# Altium PCB PCB.PcbDoc (part 1 of 2)
Units mil, origin at the board's own origin, x right, y up, seen from the top; angles counter-clockwise.
Board outline 2112 x 1014.5 mil, 4 copper layers (Top Layer, Layer 1, Layer 2, Bottom Layer), stack 36.268 mil thick; 50 components, 39 nets, 226 pads, 302 vias.
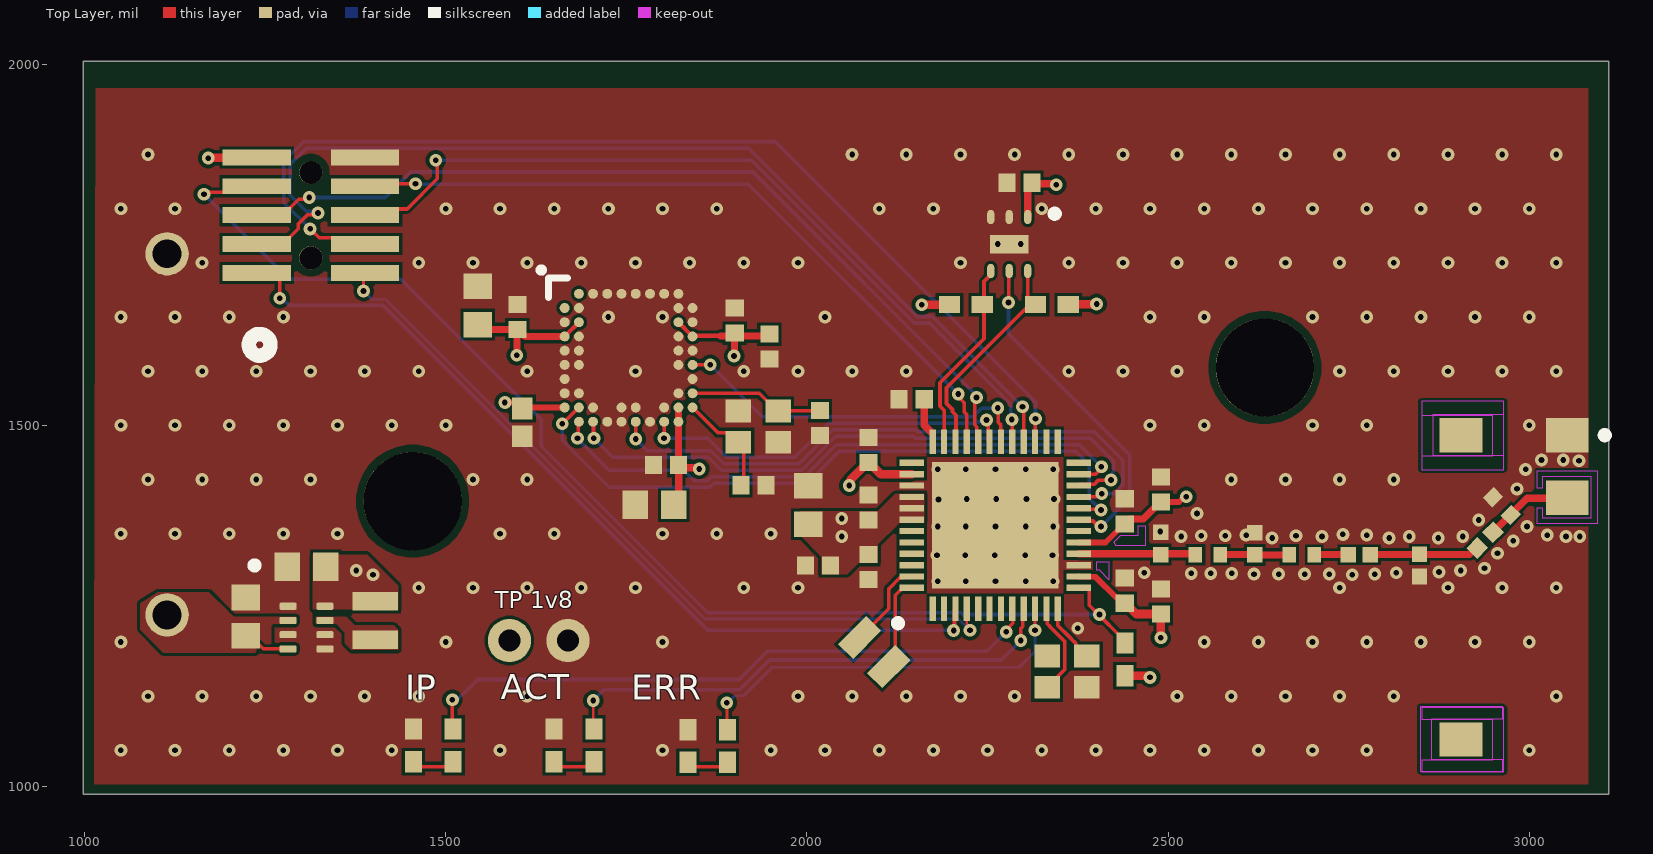
[diagram p0: Top Layer view]
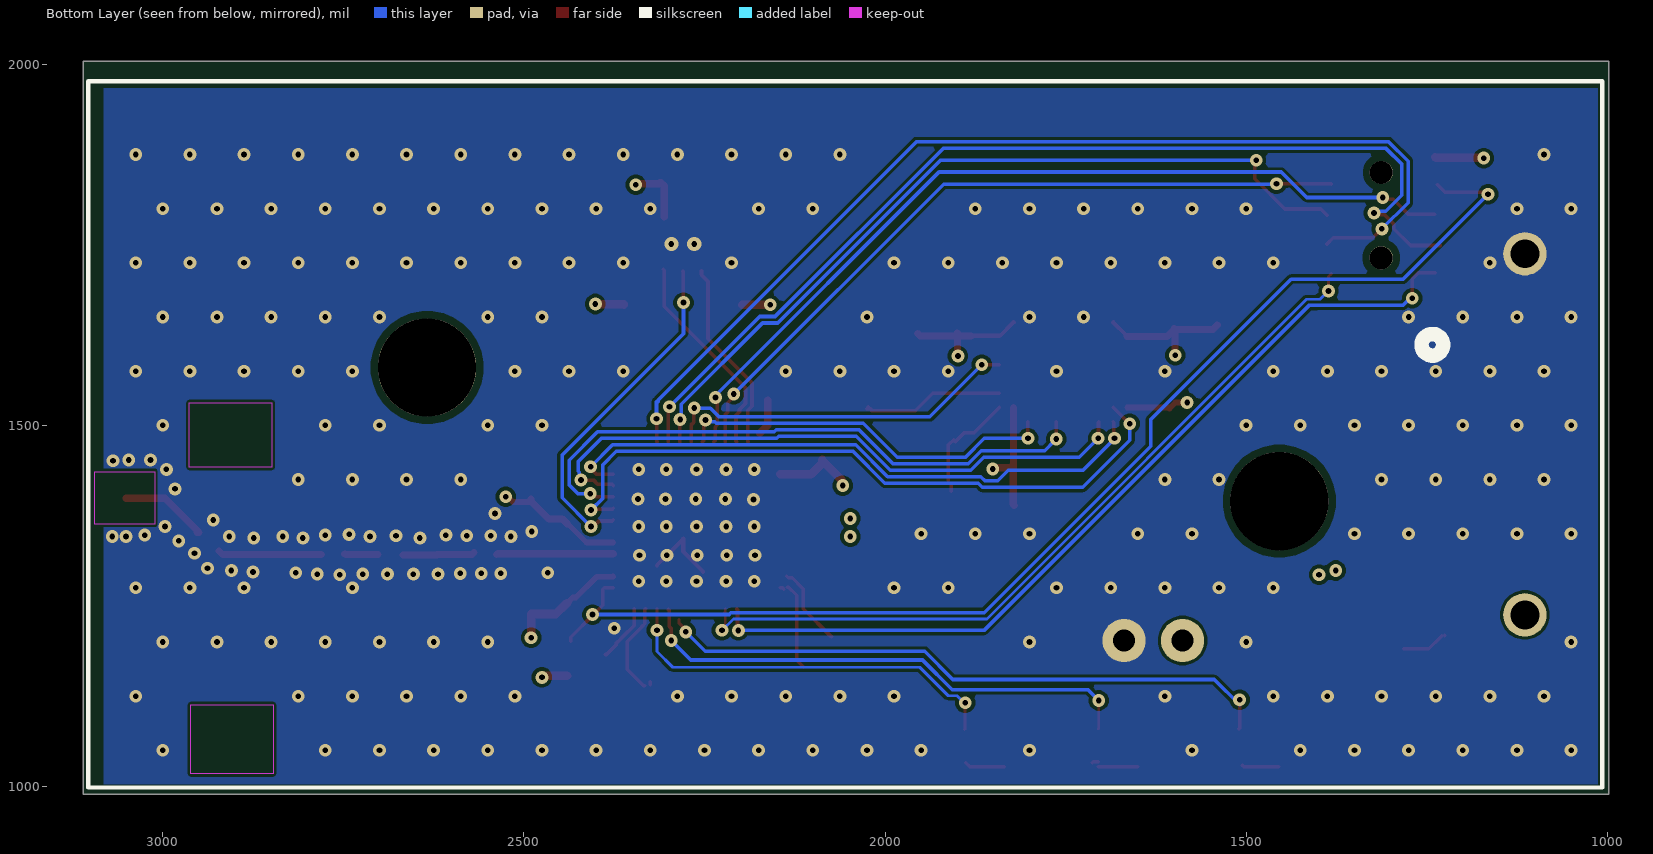
[diagram p1: Bottom Layer view, seen from below]
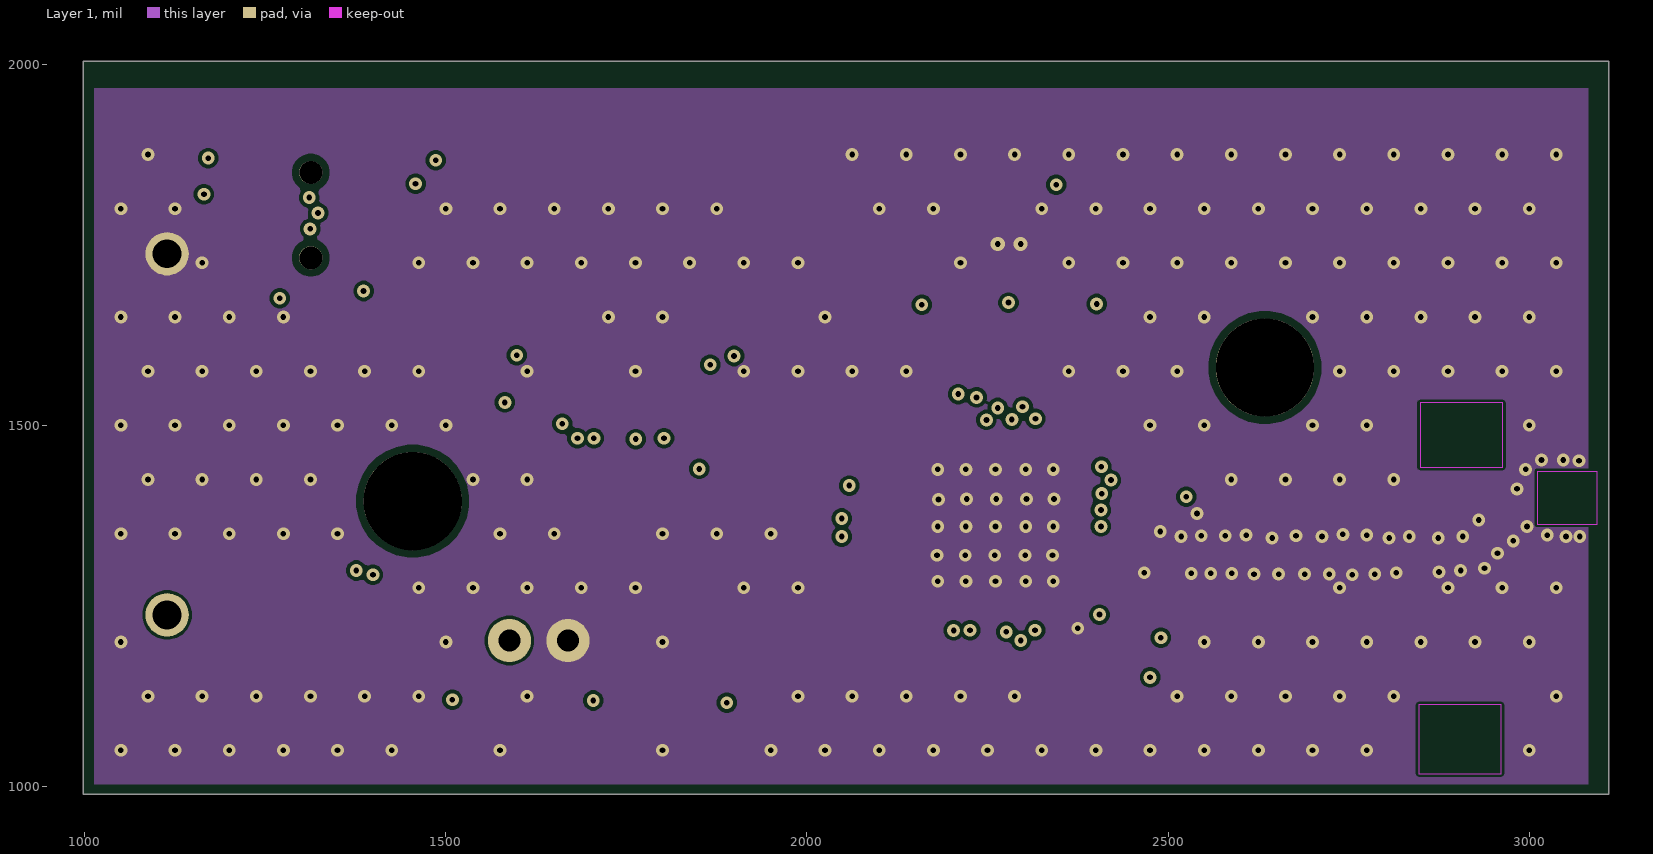
[diagram p2: Layer 1]
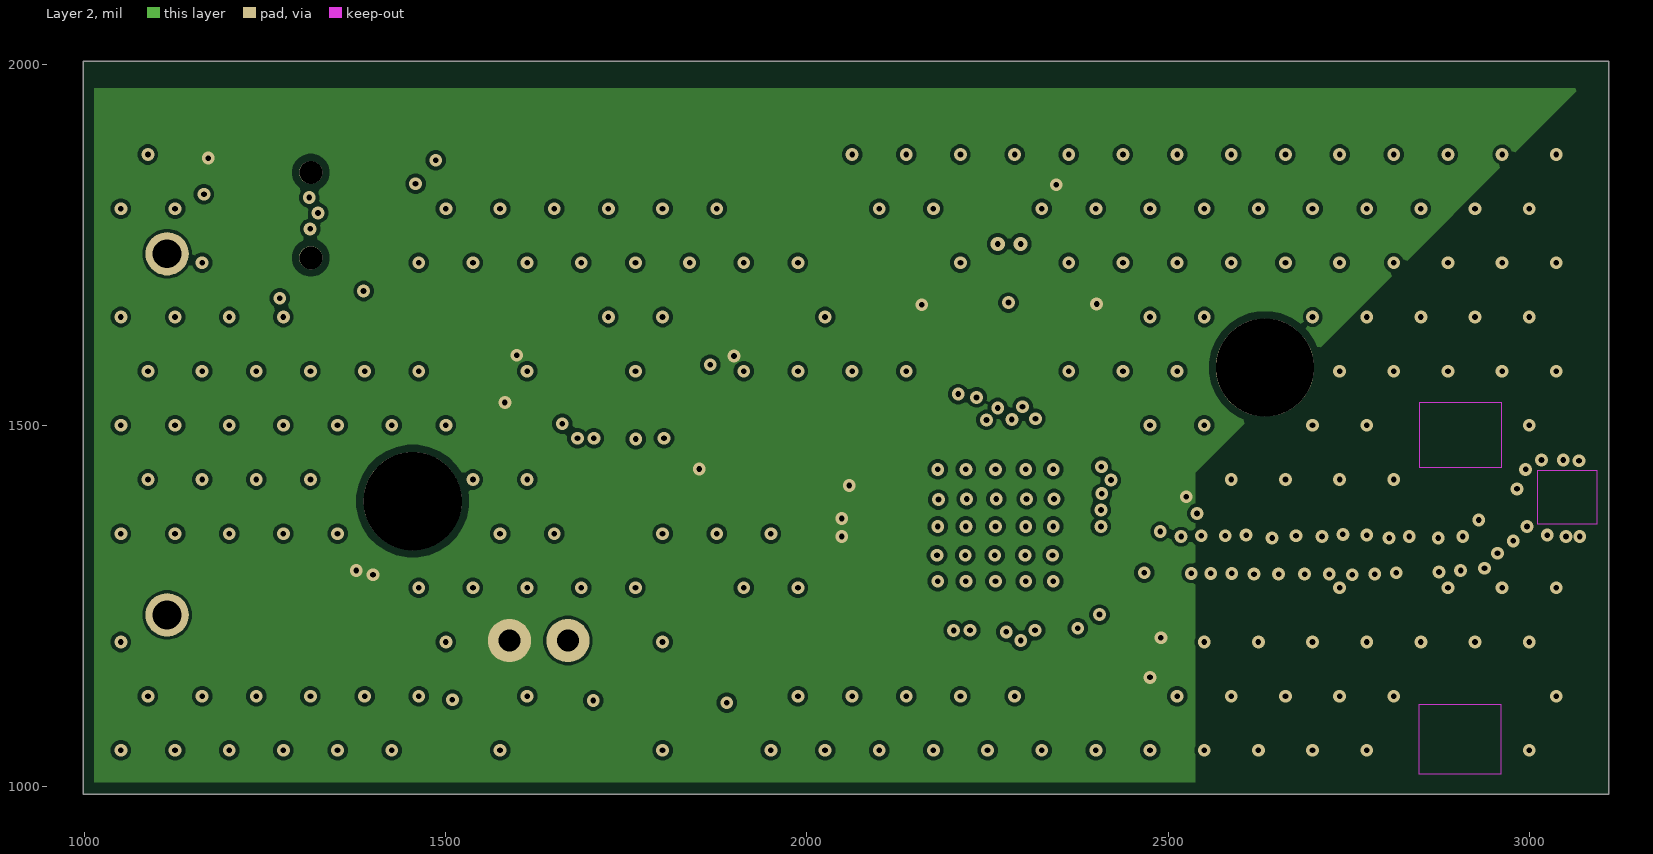
[diagram p3: Layer 2]

## Layer stack, top to bottom
Top Solder: solder mask 0.5, Solder Resist, Dk 3.8
Top Layer: signal copper 1.378
Dielectric 2: prepreg 8.284, PP-006, Dk 4.6
Layer 1: signal copper 0.598
Dielectric 1: dielectric 15.748, FR-4, Dk 4.6
Layer 2: signal copper 0.598
Dielectric 3: prepreg 8.284, PP-006, Dk 4.6
Bottom Layer: signal copper 1.378
Bottom Solder: solder mask 0.5, Solder Resist, Dk 3.8

## Board outline
998,989.5 3110,989.5 3110,2004 998,2004

## Design rules (kind name [scope] priority, off if disabled: settings)
BoardOutlineClearance [All] p1: gap=7.87 ignorepadtopadclearanceinfootprint=FALSE
Clearance [All] p1: gap=4 ignorepadtopadclearanceinfootprint=FALSE except(5: Arc-Via Track-Via SMDPad-Via THPad-Via Via-Via Via-Fill Via-Poly Via-Region Via-Text; 9.84: Arc-Hole Track-Hole SMDPad-Hole THPad-Hole Via-Hole Fill-Hole Poly-Hole Region-Hole Text-Hole)
ComponentClearance [All] p1: gap=4 collisioncheckmode=3 verticalgap=4 showdistances=TRUE
DiffPairsRouting [All] p1: maxlimit=4 minlimit=4 mostfreqgap=4 toplayer_minwidth=4 toplayer_maxwidth=71497.94 toplayer_prefwidth=4 midlayer1_minwidth=4 midlayer1_maxwidth=71497.94 midlayer1_prefwidth=4 midlayer2_minwidth=4 midlayer2_maxwidth=71497.94 midlayer2_prefwidth=4 bottomlayer_minwidth=4 bottomlayer_maxwidth=71497.94 bottomlayer_prefwidth=4 maxuncoupledlength=500
Height [All] p1: minheight=0 maxheight=71497.94 prefheight=500
HoleSize [All] p1: absolutevalues=TRUE maxlimit=248.03 minlimit=7.87 maxpercent=80.000 minpercent=20.000
HoleToHoleClearance [All] p1: gap=9.84 allowstackedmicrovias=FALSE
MinimumAnnularRing [All] p1: minimumring=3
MinimumSolderMaskSliver [All] p1: minsoldermaskwidth=0
PlaneClearance [All] p1: clearance=4
PlaneConnect PlaneConnectPowerPads [InPadClass('PowerPads')] p1: planeconnectstyle=Direct reliefexpansion=20 reliefentries=4 reliefconductorwidth=10 reliefairgap=10
PlaneConnect [All] p2: planeconnectstyle=Direct reliefexpansion=11.81 reliefentries=4 reliefconductorwidth=4 reliefairgap=4
PolygonConnect PolygonConnectPowerPads [All vs (InPadClass('PowerPads'))] p1: connectstyle=Direct reliefconductorwidth=10 reliefentries=4 polygonreliefangle="90 Angle" airgapwidth=10
PolygonConnect [All] p2: connectstyle=Direct reliefconductorwidth=4 reliefentries=4 polygonreliefangle="90 Angle" airgapwidth=4
RoutingVias [All] p1: holewidth=7.87 width=17.72 viastyle="Through Hole" minholewidth=7.87 minwidth=17.72 maxholewidth=248.03 maxwidth=257.87
SilkToSilkClearance [All] p1: silktosilkclearance=0
SilkToSolderMaskClearance [IsPad] p1: minsilkscreentomaskgap=4 clearancetoexposedcopper=TRUE
SolderMaskExpansion SolderMaskExpansion_Via [IsVia] p1: expansion=4 istentingtop=TRUE
SolderMaskExpansion [All] p2: expansion=1.5 istentingtop=FALSE
Width RF [InNetClass('RF')] p1: maxlimit=9.85 minlimit=6.36 preferedwidth=9.85 toplayer_minwidth=9.85 midlayer1_maxwidth=6.36 midlayer1_prefwidth=6.36 midlayer2_maxwidth=6.36 midlayer2_prefwidth=6.36 bottomlayer_minwidth=9.85 impedanceprofiledriven=TRUE impedanceprofileid={7871C38E-8079-4EB3-8F0D-3CB9D55A1E68} impedanceprofilevalue=50.000000 minimp=50.000000 maximp=50.000000 favimp=50.000000
Width [All] p2: maxlimit=71497.94 minlimit=4 preferedwidth=4
20 further rules are at their usual default settings.

## Classes and differential pairs
net class RF: NetANT1_2 NetC1_1 NetC1_2 NetC3_2 NetC4_2
component class power: B1
component class mcu: C14

## Components (designator, comment, footprint, x,y, rotation, side; value= is the part's Value field where it differs from the comment)
ANT1 "" FP-PRO-OB-440-MFG 2979,1320 r0 top
B1 "" 2468_KEY 1114,1237.5 r90 bottom
C1 "" "CAP 0402_1005 RF" 2764.65,1321 r180 top value="18 pF"
C2 "" "CAP 0402_1005" 2145,1536 r0 top value="1 µF"
C3 "" "CAP 0402_1005 RF" 2620,1336 r270 top value="1.6 pF"
C4 "" "CAP 0402_1005 RF" 2490,1336.35 r270 top value="2.3 pF"
C5 "" "CAP 0402_1005" 2085,1303.68 r90 top value="0.1 µF"
C6 "" "CAP 0402_1005" 2085,1386 r270 top value="0.1 µF"
C7 "" "CAP 0402_1005" 2085,1466 r270 top value="1 µF"
C8 "" "CAP 0402_1005" 2015,1306 r0 top value="1 µF"
C9 "" "CAP 0603_1608" 2002,1389.57 r270 top value="10 µF"
C10 "" "CAP 0402_1005" 2440,1271 r270 top value=100pF
C11 "" "CAP 0402_1005" 2440,1381 r270 top value="0.1 µF"
C12 "" "CAP 0402_1005" 2490,1256 r270 top value="0.1 µF"
C13 "" "CAP 0402_1005" 2490,1411 r270 top value="1 µF"
C14 "" "CAP 0402_1005" 2294.1,1835.78 r0 top value="0.1 µF"
C15 "" "CAP 0402_1005" 1925.68,1417 r180 top value="9 pF"
C16 "" "CAP 0402_1005" 2018,1503 r90 top value="9 pF"
C17 "" CAPC1050X55X23ML05T13 1606,1504 r90 top
C18 "" "CAP 0402_1005" 1805,1445 r0 top value="0.1 µF"
C19 "" "CAP 0402_1005" 1599,1650 r270 top value="0.1 µF"
C20 "" "CAP 0402_1005" 1900,1645 r270 top value="0.1 µF"
C21 "" "CAP 0402_1005" 1948,1609 r90 top value="1 µF"
C22 "" "CAP 0603_1608" 1544,1666 r90 top value="22 µF"
C23 "" "CAP 0603_1608" 1789,1390 r0 top value="22 µF"
C24 "" "CAP 0603_1608" 1223,1235 r270 top value=4.7uF
C25 "" "CAP 0603_1608" 1307,1304 r0 top value="10 µF"
C26 "" "CAP 0402_1005 RF" 2848,1306 r90 top value=NC
C27 "" "CAP 0402_1005 RF" 2939,1341 r225 top value=0.5pF
D1 "" "LED 0402_1005 YELLOW" 1455,1057 r90 top value=Yellow
D2 "" "LED 0402_1005 YELLOW" 1650,1057 r90 top value=Yellow
D3 "" "LED 0402_1005 YELLOW" 1835,1056 r90 top value=Yellow
J1 "" CONN10_M40-3200545R_HRW 1313,1791 r90 top
L1 "" "IND 0402_1005 RF WW" 2685,1321 r180 top value="1.7 nH"
L2 "" "IND 0402_1005 RF WW" 2555,1321 r180 top value="2.5 nH"
L3 "" "TDK VLS201612CX" 1402,1230 r90 top value="2.2 µH"
L4 "" "IND 0402_1005 RF WW" 2962,1388 r135 top value=1.5nH
R1 "" "RES 0402_1005" 1510,1057 r90 top
R2 "" "RES 0402_1005" 2339,1667 r0 top value="10 kOhms"
R3 "" "RES 0402_1005" 1705,1057 r90 top value="1.5 kOhms"
R4 "" "RES 0402_1005" 2220,1667 r180 top value="10 kOhms"
R5 "" "RES 0402_1005" 1890,1056 r90 top value="1.5 kOhms"
R6 "" "RES 0402_1005" 2440,1176 r90 top value="10 kOhms"
U1 "" QFN48_0p4_6sq_SIL 2260.63,1361.55 r90 top
U2 "" FP-DNP0006A-MFG 2280,1751 r270 top
U3 "" BGA50N50P10X10_520X550X89N 1753.04,1593.57 r0 top
U4 "" FP-DLC0008B-MFG 1307,1220 r0 top
Y1 "" FP-CX2016DB48000C0WPLA2-MFG 2360,1159 r0 top
Y2 "" FP-CX2016DB48000C0WPLA2-MFG 1932.56,1498.35 r0 top
Y3 "" FP-ABS06-MFG 2093,1186 r315 top

## Footprints (in the part's own frame and the unit in brackets; to place one, negate y for a bottom-side part, rotate by r counter-clockwise, add the part's x,y. Pads: shape width x height; smd on the part's side, far side on the other; paste and mask are expansions set on the pad)
2468_KEY [mil]
  round 60 hole 40 mask+0: 1(0,0) 2(500,0)
  round 136 hole 136 unplated: 3(157.5,340) 4(342.5,1520)
  silkscreen extent -239,-107 739,1989, body extent 0,0 10,10, height 10
BGA50N50P10X10_520X550X89N [mm]
  round 0.35 smd: A2(-1.75,2.25) A3(-1.25,2.25) A4(-0.75,2.25) A5(-0.25,2.25) A6(0.25,2.25) A7(0.75,2.25) A8(1.25,2.25) A9(1.75,2.25) B1(-2.25,1.75) B2(-1.75,1.75) B9(1.75,1.75) B10(2.25,1.75) C1(-2.25,1.25) C2(-1.75,1.25) C9(1.75,1.25) C10(2.25,1.25) D1(-2.25,0.75) D2(-1.75,0.75) D9(1.75,0.75) D10(2.25,0.75) E1(-2.25,0.25) E2(-1.75,0.25) E9(1.75,0.25) E10(2.25,0.25) F1(-2.25,-0.25) F2(-1.75,-0.25) F9(1.75,-0.25) F10(2.25,-0.25) G1(-2.25,-0.75) G10(2.25,-0.75) H1(-2.25,-1.25) H2(-1.75,-1.25) H9(1.75,-1.25) H10(2.25,-1.25) J1(-2.25,-1.75) J2(-1.75,-1.75) J3(-1.25,-1.75) J5(-0.25,-1.75) J6(0.25,-1.75) J8(1.25,-1.75) J9(1.75,-1.75) J10(2.25,-1.75) K2(-1.75,-2.25) K3(-1.25,-2.25) K4(-0.75,-2.25) K5(-0.25,-2.25) K6(0.25,-2.25) K7(0.75,-2.25) K8(1.25,-2.25) K9(1.75,-2.25)
  silkscreen extent -3.17,2.98 -2.97,3.18
"CAP 0402_1005" [mm] "Chip Capacitor, 2-Leads, Body 1.02x0.51mm, IPC Medium Density"
  rect 0.6x0.64 smd: 1(-0.44,0) 2(0.44,0)
  body extent -0.5,-0.26 0.5,0.26, height 0.52
"CAP 0402_1005 RF" [mm] "Chip Capacitor, 2-Leads, Body 1.02x0.51mm, IPC High Density"
  rect 0.55x0.54 smd: 1(-0.39,0) 2(0.39,0)
  body extent -0.5,-0.26 0.5,0.26, height 0.52
"CAP 0603_1608" [mm] "Chip Capacitor, 2-Leads, Body 1.60x0.80mm, IPC Medium Density"
  rect 0.9x1 smd: 1(-0.675,0) 2(0.675,0)
  body extent -0.8,-0.41 0.8,0.41, height 0.82
CAPC1050X55X23ML05T13 [mm] "Chip Capacitor, 2-Leads, Body 1.05x0.55mm, IPC Low Density"
  rect 0.76x0.72 smd: 1(-0.49,0) 2(0.49,0)
  body extent -0.53,-0.28 0.53,0.27, height 0.55
CONN10_M40-3200545R_HRW [mm]
  rect 0.56x2.4 smd paste+0 mask+0: 1(-2.032,1.905) 2(-1.016,1.905) 3(0,1.905) 4(1.016,1.905) 5(2.032,1.905) 6(-2.032,-1.905) 7(-1.016,-1.905) 8(0,-1.905) 9(1.016,-1.905) 10(2.032,-1.905)
  round 0.813 hole 0.813 unplated: 11(-1.5,0) 12(1.5,0)
  silkscreen extent -4.94,1.42 -4.18,2.18, body extent 0,0 0.25,0.25, height 0.25
FP-ABS06-MFG [mm]
  rect 0.75x1.4 smd paste+0 mask+0: 1(-0.725,0) 2(0.725,0)
  body extent -1.2,-0.8 1.2,0.8, height 0.25
FP-CX2016DB48000C0WPLA2-MFG [mm]
  rect 0.9x0.8 smd paste+0 mask+0: 1(-0.7,-0.55) 2(0.7,-0.55) 3(0.7,0.55) 4(-0.7,0.55)
  silkscreen extent -6.07,1.58 -5.82,1.83, body extent -1.25,-1.05 1.25,1.05, height 0.25
FP-DLC0008B-MFG [mm]
  rrect40% 0.6x0.25 smd paste+0 mask+0: 1(-0.65,0.75) 2(-0.65,0.25) 3(-0.65,-0.25) 4(-0.65,-0.75) 5(0.65,-0.75) 6(0.65,-0.25) 7(0.65,0.25) 8(0.65,0.75)
  silkscreen extent -1.95,2.06 -1.7,2.31, body extent -1.05,-1.15 1.05,1.15, height 0.25
FP-DNP0006A-MFG [mm]
  rrect100% 0.5x0.25 smd paste+0 mask+0: 1(-0.95,0.65) 2(-0.95,0) 3(-0.95,-0.65) 4(0.95,-0.65) 5(0.95,0) 6(0.95,0.65)
  rect 0.65x1.35 smd paste-1000 mask+0: 7(0,0)
  silkscreen extent -1.19,1.48 -0.94,1.73, body extent -1.3,-1.15 1.3,1.15, height 0.25
FP-PRO-OB-440-MFG [mm]
  rect 1.5x1.2 smd paste+0 mask+0: 1(1.865,4.225) 2(1.865,2.025) 3(-1.865,4.225) 4(-1.865,-6.475)
  silkscreen extent 3.07,4.1 3.32,4.35
"IND 0402_1005 RF WW" [mm] "Chip Inductor, 2-Leads, Body 1.00x0.50mm, IPC High Density"
  rect 0.48x0.54 smd: 1(-0.44,0) 2(0.44,0)
  body extent -0.5,-0.29 0.5,0.29, height 0.51
"LED 0402_1005 YELLOW" [mm] "Chip Diode, 2-Leads, Body 1.00x0.50mm, IPC Medium Density"
  rect 0.75x0.6 smd: 1(-0.575,0) 2(0.575,0)
  body extent -0.5,-0.25 0.5,0.25, height 0.21
QFN48_0p4_6sq_SIL [mm]
  rect 0.86x0.22 smd paste+0 mask+0: 1(-2.935,2.2) 2(-2.935,1.8) 3(-2.935,1.4) 4(-2.935,1) 5(-2.935,0.6) 6(-2.935,0.2) 7(-2.935,-0.2) 8(-2.935,-0.6) 9(-2.935,-1) 10(-2.935,-1.4) 11(-2.935,-1.8) 12(-2.935,-2.2) 25(2.935,-2.2) 26(2.935,-1.8) 27(2.935,-1.4) 28(2.935,-1) 29(2.935,-0.6) 30(2.935,-0.2) 31(2.935,0.2) 32(2.935,0.6) 33(2.935,1) 34(2.935,1.4) 35(2.935,1.8) 36(2.935,2.2)
  rect 0.22x0.86 smd paste+0 mask+0: 13(-2.2,-2.935) 14(-1.8,-2.935) 15(-1.4,-2.935) 16(-1,-2.935) 17(-0.6,-2.935) 18(-0.2,-2.935) 19(0.2,-2.935) 20(0.6,-2.935) 21(1,-2.935) 22(1.4,-2.935) 23(1.8,-2.935) 24(2.2,-2.935) 37(2.2,2.935) 38(1.8,2.935) 39(1.4,2.935) 40(1,2.935) 41(0.6,2.935) 42(0.2,2.935) 43(-0.2,2.935) 44(-0.6,2.935) 45(-1,2.935) 46(-1.4,2.935) 47(-1.8,2.935) 48(-2.2,2.935)
  rect 4.45x4.45 smd paste-2.212 mask+0: 49(0,0)
  body extent -3,-3 3,3, height 0.9
"RES 0402_1005" [mm] "Chip Resistor, 2-Leads, Body 1.0x0.5mm, IPC Medium Density"
  rect 0.75x0.6 smd: 1(-0.575,0) 2(0.575,0)
  body extent -0.5,-0.25 0.5,0.25, height 0.35
"TDK VLS201612CX" [mm] "Inductor, 2-Leads, Body 2.00x1.60mm, IPC Medium Density"
  rect 0.65x1.6 smd: 1(-0.675,0) 2(0.675,0)
  body extent -1,-0.8 1,0.8, height 1.2

## Part data
ANT1: library part CMP-231248-000001-1, "RF ANT 2.4GHZ STAMPED MET SLD", Manufacturer=ProAnt, Manufacturer Part Number=PRO-OB-440, Max Frequency=2500MHz, Temperature="-40°C to +125°C", Temperature Range High=+125°C, Temperature Range Low=-40°C, Automotive=No, Bandwidth=2400-2500MHz, Category=Ant, ComponentLink2Description=Datasheet, ComponentLink2URL=http://www.proant.se/files/user/Documents/Datasheets%20and%20appnotes/Upload%202018-06-08/Application%20note%20-%20OnBoard%20SMD%202400%20MHz%20rev%203.2.pdf, Device Class L1="Integrated Circuits (ICs)", Device Class L2="RF Semiconductors and Devices", Device Class L3="RF Antennas", Digikey Description="RF ANT 2.4GHZ STAMPED MET SLD", Height=3.53mm, Impedance=50Ω, Lead Free=Yes, Number Of Bands=1, Octopart=https://octopart.com/pro-ob-440-proant+ab-62921801, Package=PRO-OB-440, Return Loss=-10dB, RoHS=TRUE
B1: library part 2468, "No Description Available", Mfr_Name="Keystone Electronics", Copyright="Copyright (C) 2022 Ultra Librarian. All rights reserved.", Manufacturer_Part_Number=2468, RefDes=RefDes, Type=DEV
C1: library part 600L180FW200T, "CAP CER 18PF 200V NP0 0402", Capacitance="18 pF", Device Package="0402 (1005 Metric)", Manufacturer="American Technical Ceramics", Operating Temperature="-55°C ~ 125°C", Supplier Part Number 1=478-12298-1-ND, Temperature Coefficient="C0G, NP0", Tolerance=±1%, Voltage - Rated=200V, Applications="RF, Microwave, High Frequency, Bypass, Decoupling", componentlink1description=Datasheet, componentlink1url=http://www.atceramics.com/UserFiles/600l.pdf, ComponentLink2Description="DigiKey Link", ComponentLink2URL=https://www.digikey.com/en/products/detail/american-technical-ceramics/600L180FW200T/3908918, Features="High Q, Low Loss, Ultra Low ESR", lastupdated="1/9/2022 1:07:41 pm", Lifecycle Status=Active, Minimum Order=1, Mounting Type="Surface Mount, MLCC", Package / Case="0402 (1005 Metric)", packaging=TapeAndReel, Part Number=600L180FW200T, Part Status=Active, partid=1343, price=0.49, series="ATC 600L", Size / Dimension="0.040\" L x 0.020\" W (1.02mm x 0.51mm)", Supplier 1=DigiKey, Thickness (Max)="0.024\" (0.60mm)"
C2: library part C0402C104K7PAC7867, "CAP CER 0.1UF 4V X5R 0402", Capacitance="1 µF", Device Package="0402 (1005 Metric)", Manufacturer=KEMET, Operating Temperature="-55°C ~ 85°C", Supplier Part Number 1=399-14871-1-ND, Temperature Coefficient=X5R, Tolerance=±10%, Voltage - Rated=4V, Applications="Bypass, Decoupling", componentlink1description=Datasheet, componentlink1url=https://api.kemet.com/component-edge/download/datasheet/C0402C104K7PAC7867.pdf, ComponentLink2Description="DigiKey Link", ComponentLink2URL=https://www.digikey.com/en/products/detail/kemet/C0402C104K7PAC7867/7381987, lastupdated="1/9/2022 12:30:40 pm", Lifecycle Status=Active, Minimum Order=1, Mounting Type="Surface Mount, MLCC", Package / Case="0402 (1005 Metric)", packaging=TapeAndReel, Part Number=C0402C104K7PAC7867, Part Status=Active, partid=5603, price=0.01, series="SMD Comm X5R", Size / Dimension="0.039\" L x 0.020\" W (1.00mm x 0.50mm)", Supplier 1=DigiKey, Thickness (Max)="0.022\" (0.55mm)"
C3: library part GJM1555C1H1R6CB01D, "CAP CER 1.6PF 50V C0G/NP0 0402", Capacitance="1.6 pF", Device Package="0402 (1005 Metric)", Manufacturer="Murata Electronics", Operating Temperature="-55°C ~ 125°C", Supplier Part Number 1=490-3088-1-ND, Temperature Coefficient="C0G, NP0", Tolerance=±0.25pF, Voltage - Rated=50V, Applications="RF, Microwave, High Frequency", componentlink1description=Datasheet, componentlink1url=https://search.murata.co.jp/Ceramy/image/img/A01X/G101/ENG/GJM1555C1H1R6CB01-01.pdf, ComponentLink2Description="DigiKey Link", ComponentLink2URL=https://www.digikey.com/en/products/detail/murata-electronics/GJM1555C1H1R6CB01D/702281, Features="High Q, Low Loss", lastupdated="1/9/2022 1:07:42 pm", Lifecycle Status=Active, Minimum Order=1, Mounting Type="Surface Mount, MLCC", Package / Case="0402 (1005 Metric)", packaging=TapeAndReel, Part Number=GJM1555C1H1R6CB01D, Part Status=Active, partid=624, price=0.01, series=GJM, Size / Dimension="0.039\" L x 0.020\" W (1.00mm x 0.50mm)", Supplier 1=DigiKey, Thickness (Max)="0.022\" (0.55mm)"
C4: library part GJM1555C1H2R3BB01D, "CAP CER 2.3PF 50V C0G/NP0 0402", Capacitance="2.3 pF", Device Package="0402 (1005 Metric)", Manufacturer="Murata Electronics", Operating Temperature="-55°C ~ 125°C", Supplier Part Number 1=490-GJM1555C1H2R3BB01DCT-ND, Temperature Coefficient="C0G, NP0", Tolerance=±0.1pF, Voltage - Rated=50V, Applications="RF, Microwave, High Frequency", componentlink1description=Datasheet, componentlink1url=https://search.murata.co.jp/Ceramy/image/img/A01X/G101/ENG/GJM1555C1H2R3BB01-01.pdf, ComponentLink2Description="DigiKey Link", ComponentLink2URL=https://www.digikey.com/en/products/detail/murata-electronics/GJM1555C1H2R3BB01D/2592923, Features="High Q, Low Loss", lastupdated="1/9/2022 1:07:39 pm", Lifecycle Status=Active, Minimum Order=1, Mounting Type="Surface Mount, MLCC", Package / Case="0402 (1005 Metric)", packaging=TapeAndReel, Part Number=GJM1555C1H2R3BB01D, Part Status=Active, partid=2854, price=0.02, series=GJM, Size / Dimension="0.039\" L x 0.020\" W (1.00mm x 0.50mm)", Supplier 1=DigiKey, Thickness (Max)="0.022\" (0.55mm)"
C5 C11 C12 C14 C18 C19 C20: library part C0402C104K7PAC7867, "CAP CER 0.1UF 4V X5R 0402", Capacitance="0.1 µF", Device Package="0402 (1005 Metric)", Manufacturer=KEMET, Operating Temperature="-55°C ~ 85°C", Supplier Part Number 1=399-14871-1-ND, Temperature Coefficient=X5R, Tolerance=±10%, Voltage - Rated=4V, Applications="Bypass, Decoupling", componentlink1description=Datasheet, componentlink1url=https://api.kemet.com/component-edge/download/datasheet/C0402C104K7PAC7867.pdf, ComponentLink2Description="DigiKey Link", ComponentLink2URL=https://www.digikey.com/en/products/detail/kemet/C0402C104K7PAC7867/7381987, Lifecycle Status=Active, Minimum Order=1, Mounting Type="Surface Mount, MLCC", Package / Case="0402 (1005 Metric)", packaging=TapeAndReel, Part Number=C0402C104K7PAC7867, Part Status=Active, partid=5603, price=0.01, series="SMD Comm X5R", Size / Dimension="0.039\" L x 0.020\" W (1.00mm x 0.50mm)", Supplier 1=DigiKey, Thickness (Max)="0.022\" (0.55mm)"
  C5 C11 C12 C14: lastupdated="1/9/2022 12:30:40 pm"
  C18 C19 C20: lastupdated="11/9/2022 9:36:31 am"
C6: library part C0402C104K4RECAUTO, "CAP CER 0402 0.1UF 16V X7R 10%", Capacitance="0.1 µF", Device Package="0402 (1005 Metric)", Manufacturer=KEMET, Operating Temperature="-55°C ~ 125°C", Ratings=AEC-Q200, Supplier Part Number 1=399-17167-1-ND, Temperature Coefficient=X7R, Tolerance=±10%, Voltage - Rated=16V, Applications="Automotive, ESD Protection", componentlink1description=Datasheet, componentlink1url=https://api.kemet.com/component-edge/download/datasheet/C0402C104K4RECAUTO.pdf, ComponentLink2Description="DigiKey Link", ComponentLink2URL=https://www.digikey.com/en/products/detail/kemet/C0402C104K4RECAUTO/8563695, lastupdated="1/9/2022 12:30:53 pm", Lifecycle Status=Active, Minimum Order=1, Mounting Type="Surface Mount, MLCC", Package / Case="0402 (1005 Metric)", packaging=TapeAndReel, Part Number=C0402C104K4RECAUTO, Part Status=Active, partid=1731, price=0.01, series="ESD SMD Auto X7R", Size / Dimension="0.039\" L x 0.020\" W (1.00mm x 0.50mm)", Supplier 1=DigiKey, Thickness (Max)="0.022\" (0.55mm)"
C7 C8: library part LMK105BJ105MVHF, "CAP CER 1UF 10V X5R 0402", Capacitance="1 µF", Device Package="0402 (1005 Metric)", Manufacturer="Taiyo Yuden", Operating Temperature="-55°C ~ 85°C", Ratings=AEC-Q200, Supplier Part Number 1=587-6276-1-ND, Temperature Coefficient=X5R, Tolerance=±20%, Voltage - Rated=10V, Applications="Automotive, SMPS Filtering", componentlink1description=Datasheet, componentlink1url="https://ds.yuden.co.jp/TYCOMPAS/ut/detail?pn=LMK105BJ105MVHF &u=M", ComponentLink2Description="DigiKey Link", ComponentLink2URL=https://www.digikey.com/en/products/detail/taiyo-yuden/LMK105BJ105MVHF/7403746, lastupdated="1/9/2022 12:30:35 pm", Lifecycle Status=Active, Minimum Order=1, Mounting Type="Surface Mount, MLCC", Package / Case="0402 (1005 Metric)", packaging=TapeAndReel, Part Number=LMK105BJ105MVHF, Part Status=Active, partid=46675, price=0.01, series=M, Size / Dimension="0.039\" L x 0.020\" W (1.00mm x 0.50mm)", Supplier 1=DigiKey, Thickness (Max)="0.022\" (0.55mm)"
C9 C24 C25: library part GRM188R60J106ME47D, "CAP CER 10UF 6.3V X5R 0603", Capacitance="10 µF", Device Package="0603 (1608 Metric)", Manufacturer="Murata Electronics", Operating Temperature="-55°C ~ 85°C", Supplier Part Number 1=490-3896-1-ND, Temperature Coefficient=X5R, Tolerance=±20%, Voltage - Rated=6.3V, Applications="General Purpose", componentlink1description=Datasheet, componentlink1url=https://www.murata.com/~/media/webrenewal/support/library/catalog/products/capacitor/mlcc/c02e.ashx?la=en-us, ComponentLink2Description="DigiKey Link", ComponentLink2URL=https://www.digikey.com/en/products/detail/murata-electronics/GRM188R60J106ME47D/965910, lastupdated="11/9/2022 9:40:24 am", Lifecycle Status=Active, Minimum Order=1, Mounting Type="Surface Mount, MLCC", Package / Case="0603 (1608 Metric)", packaging=TapeAndReel, Part Number=GRM188R60J106ME47D, Part Status=Active, partid=2351, price=0.02, series=GRM, Size / Dimension="0.063\" L x 0.031\" W (1.60mm x 0.80mm)", Supplier 1=DigiKey, Thickness (Max)="0.035\" (0.90mm)"
C10: library part 04026C101KAT2A, "CAP CER 100PF 6.3V X7R 0402", Capacitance=100pF, Device Package="0402 (1005 Metric)", Manufacturer="AVX Corporation", Operating Temperature="-55°C ~ 125°C", Supplier Part Number 1=478-12647-1-ND, Temperature Coefficient=X7R, Tolerance=±10%, Voltage - Rated=6.3V, Applications="General Purpose", componentlink1description=Datasheet, componentlink1url=http://datasheets.avx.com/X7RDielectric.pdf, ComponentLink2Description="DigiKey Link", ComponentLink2URL=http://digikey.com/product-detail/en/avx-corporation/04026C101KAT2A/478-12647-1-ND/9949180, lastupdated="8/2/2022 12:26:54 pm", Lifecycle Status=Active, Minimum Order=1, Mounting Type="Surface Mount, MLCC", Package / Case="0402 (1005 Metric)", packaging=TapeAndReel, Part Number=04026C101KAT2A, Part Status=Active, partid=4266, price=0.04, series=-, Size / Dimension="0.039\" L x 0.020\" W (1.00mm x 0.50mm)", Supplier 1=DigiKey, Thickness (Max)="0.022\" (0.56mm)"
C13: library part CGB2T1X5R0G105M022BC, "CAP CER 1UF 4V X5R 0402", Capacitance="1 µF", Device Package="0402 (1005 Metric)", Manufacturer="TDK Corporation", Operating Temperature="-55°C ~ 85°C", Supplier Part Number 1=445-15611-1-ND, Temperature Coefficient=X5R, Tolerance=±20%, Voltage - Rated=4V, Applications="General Purpose", componentlink1description=Datasheet, componentlink1url=https://product.tdk.com/info/en/catalog/datasheets/mlcc_commercial_lowprofile_en.pdf?ref_disty=digikey, ComponentLink2Description="DigiKey Link", ComponentLink2URL=https://www.digikey.com/en/products/detail/tdk-corporation/CGB2T1X5R0G105M022BC/4278344, Features="Low Profile", lastupdated="1/9/2022 12:30:48 pm", Lifecycle Status=Active, Minimum Order=1, Mounting Type="Surface Mount, MLCC", Package / Case="0402 (1005 Metric)", packaging=TapeAndReel, Part Number=CGB2T1X5R0G105M022BC, Part Status=Active, partid=2563, price=0.08, series=CGB, Size / Dimension="0.039\" L x 0.020\" W (1.00mm x 0.50mm)", Supplier 1=DigiKey, Thickness (Max)="0.009\" (0.22mm)"
C15 C16: library part CGA2B2C0G1H090D050BA, "CAP CER 9PF 50V C0G 0402", Capacitance="9 pF", Device Package="0402 (1005 Metric)", Manufacturer="TDK Corporation", Operating Temperature="-55°C ~ 125°C", Ratings=AEC-Q200, Supplier Part Number 1=445-5583-1-ND, Temperature Coefficient="C0G, NP0", Tolerance=±0.5pF, Voltage - Rated=50V, Applications=Automotive, componentlink1description=Datasheet, componentlink1url=https://product.tdk.com/info/en/catalog/datasheets/mlcc_automotive_general_en.pdf?ref_disty=digikey, ComponentLink2Description="DigiKey Link", ComponentLink2URL=https://www.digikey.com/en/products/detail/tdk-corporation/CGA2B2C0G1H090D050BA/2443061, lastupdated="14/9/2022 7:45:59 am", Lifecycle Status=Active, Minimum Order=1, Mounting Type="Surface Mount, MLCC", Package / Case="0402 (1005 Metric)", packaging=TapeAndReel, Part Number=CGA2B2C0G1H090D050BA, Part Status=Active, partid=7122, price=0.01, series=CGA, Size / Dimension="0.039\" L x 0.020\" W (1.00mm x 0.50mm)", Supplier 1=DigiKey, Thickness (Max)="0.022\" (0.55mm)"
C17: library part CMP-2000-05439-1, "Chip Capacitor, 100 nF, +/- 10%, 16 V, -55 to 125 degC, 0402 (1005 Metric), RoHS, Tape and Reel", Capacitance=100000pF, Case Size/Dimension=0402, Dielectric=X7R, Manufacturer="Samsung Electro-Mechanics", Rated Voltage=16V, Tolerance (%)=±10%, Datasheet URL=https://datasheet.ciiva.com/29198/458718-da-01-en-vs-kondensator-0402-29198423.pdf, Datasheet Version=Nov-10, Manufacturer URL=http://www.samsungsem.com/global/index.jsp
C21: library part LMK105C6105KV-F, "CAP CER 1UF 10V X6S 0402", Capacitance="1 µF", Device Package="0402 (1005 Metric)", Manufacturer="Taiyo Yuden", Operating Temperature="-55°C ~ 105°C", Supplier Part Number 1=587-3409-1-ND, Temperature Coefficient=X6S, Tolerance=±10%, Voltage - Rated=10V, Applications="SMPS Filtering", componentlink1description=Datasheet, componentlink1url=https://www.yuden.co.jp/productdata/catalog/mlcc01_e.pdf, ComponentLink2Description="DigiKey Link", ComponentLink2URL=https://www.digikey.com/en/products/detail/taiyo-yuden/LMK105C6105KV-F/4157226, lastupdated="11/9/2022 9:36:40 am", Lifecycle Status=Active, Minimum Order=1, Mounting Type="Surface Mount, MLCC", Package / Case="0402 (1005 Metric)", packaging=TapeAndReel, Part Number=LMK105C6105KV-F, Part Status=Active, partid=2215, price=0.01, series=M, Size / Dimension="0.039\" L x 0.020\" W (1.00mm x 0.50mm)", Supplier 1=DigiKey, Thickness (Max)="0.022\" (0.55mm)"
C22 C23: library part 0603ZD226MAT2A, "CAP CER 22UF 10V X5R 0603", Part Number=0603ZD226MAT2A
C26: library part 600L180FW200T, "CAP CER 18PF 200V NP0 0402", Capacitance=NA, Device Package="0402 (1005 Metric)", Manufacturer="American Technical Ceramics", Operating Temperature="-55°C ~ 125°C", Supplier Part Number 1=478-12298-1-ND, Temperature Coefficient="C0G, NP0", Tolerance=±1%, Voltage - Rated=200V, Applications="RF, Microwave, High Frequency, Bypass, Decoupling", componentlink1description=Datasheet, componentlink1url=http://www.atceramics.com/UserFiles/600l.pdf, ComponentLink2Description="DigiKey Link", ComponentLink2URL=https://www.digikey.com/en/products/detail/american-technical-ceramics/600L180FW200T/3908918, Features="High Q, Low Loss, Ultra Low ESR", lastupdated="1/9/2022 1:07:41 pm", Lifecycle Status=Active, Minimum Order=1, Mounting Type="Surface Mount, MLCC", Package / Case="0402 (1005 Metric)", packaging=TapeAndReel, Part Number=600L180FW200T, Part Status=Active, partid=1343, price=0.49, series="ATC 600L", Size / Dimension="0.040\" L x 0.020\" W (1.02mm x 0.51mm)", Supplier 1=DigiKey, Thickness (Max)="0.024\" (0.60mm)"
C27: library part 600L180FW200T, "CAP CER 18PF 200V NP0 0402", Capacitance=0.5pF, Device Package="0402 (1005 Metric)", Manufacturer="American Technical Ceramics", Operating Temperature="-55°C ~ 125°C", Supplier Part Number 1=478-12298-1-ND, Temperature Coefficient="C0G, NP0", Tolerance=±1%, Voltage - Rated=200V, Applications="RF, Microwave, High Frequency, Bypass, Decoupling", componentlink1description=Datasheet, componentlink1url=http://www.atceramics.com/UserFiles/600l.pdf, ComponentLink2Description="DigiKey Link", ComponentLink2URL=https://www.digikey.com/en/products/detail/american-technical-ceramics/600L180FW200T/3908918, Features="High Q, Low Loss, Ultra Low ESR", lastupdated="1/9/2022 1:07:41 pm", Lifecycle Status=Active, Minimum Order=1, Mounting Type="Surface Mount, MLCC", Package / Case="0402 (1005 Metric)", packaging=TapeAndReel, Part Number=600L180FW200T, Part Status=Active, partid=1343, price=0.49, series="ATC 600L", Size / Dimension="0.040\" L x 0.020\" W (1.02mm x 0.51mm)", Supplier 1=DigiKey, Thickness (Max)="0.024\" (0.60mm)"
D1 D2 D3: library part BL-HKC37A-AV-TRB, "0402 YELLOW", Color=Yellow, Current - Test=20mA, Device Package="0402 (1005 Metric)", Lens Color=Colorless, Manufacturer="American Bright Optoelectronics Corporation", Millicandela Rating=120mcd, Supplier Device Package=0402, Supplier Part Number 1=BL-HKC37A-AV-TRBCT-ND, Voltage - Forward (Vf) (Typ)=2.2V, componentlink1description=Datasheet, componentlink1url=https://americanbrightled.com/pdffiles/smt/BL-HKC37A-AV-TRB.pdf, ComponentLink2Description="DigiKey Link", ComponentLink2URL=https://www.digikey.com/en/products/detail/american-bright-optoelectronics-corporation/BL-HKC37A-AV-TRB/9678171, Configuration=Standard, Height (Max)=0.45mm, lastupdated="11/9/2022 10:29:51 am", Lens Style="Rectangle with Flat Top", Lens Transparency=Clear, Lifecycle Status=Active, Minimum Order=1, Mounting Type="Surface Mount", Package / Case="0402 (1005 Metric)", packaging=TapeAndReel, Part Number=BL-HKC37A-AV-TRB, Part Status=Active, partid=1041, price=0.06, series=-, Size / Dimension="1.00mm L x 0.50mm W", Supplier 1=DigiKey, Viewing Angle=120°, Wavelength - Dominant=589nm, Wavelength - Peak=590nm
J1: library part M40-3200545R, "No Description Available", Mfr_Name=Harwin, Copyright="Copyright (C) 2022 Ultra Librarian. All rights reserved.", Manufacturer_Part_Number=M40-3200545R, RefDes=RefDes, Type=DEV
L1 L4: library part LQW15AN1N7D8ZD, "FIXED IND 1.7NH 1.15A 65MOHM SMD", Current Rating (Amps)="1.15 A", DC Resistance (DCR)="65mOhm Max", Device Package="0402 (1005 Metric)", Frequency - Self Resonant=18GHz, Inductance="1.7 nH", Inductance Frequency - Test="100 MHz", Manufacturer="Murata Electronics", Operating Temperature="-55°C ~ 125°C", Q @ Freq="20 @ 250MHz", Ratings=AEC-Q200, Supplier Part Number 1=490-15358-1-ND, Tolerance=±0.5nH, componentlink1description=Datasheet, componentlink1url=https://search.murata.co.jp/Ceramy/image/img/P02/JELF243A-9138.pdf, ComponentLink2Description="DigiKey Link", ComponentLink2URL=https://www.digikey.com/en/products/detail/murata-electronics/LQW15AN1N7D8ZD/6798783, Height - Seated (Max)="0.024\" (0.60mm)", lastupdated="1/9/2022 1:17:33 pm", Lifecycle Status=Active, Material - Core=Non-Magnetic, Minimum Order=1, Mounting Type="Surface Mount", Package / Case="0402 (1005 Metric)", packaging=TapeAndReel, Part Number=LQW15AN1N7D8ZD, Part Status=Active, partid=80, price=0.07, series=LQW15, Shielding=Unshielded, Size / Dimension="0.039\" L x 0.024\" W (1.00mm x 0.60mm)", Supplier 1=DigiKey, Supplier Device Package="0402 (1005 Metric)", Type=Wirewound
L2: library part LQW15AN2N5B00D, "FIXED IND 2.5NH 850MA 50MOHM SMD", Current Rating (Amps)="850 mA", DC Resistance (DCR)="50mOhm Max", Device Package="0402 (1005 Metric)", Frequency - Self Resonant=15GHz, Inductance="2.5 nH", Inductance Frequency - Test="100 MHz", Manufacturer="Murata Electronics", Operating Temperature="-55°C ~ 125°C", Q @ Freq="20 @ 250MHz", Supplier Part Number 1=490-8437-1-ND, Tolerance=±0.1nH, componentlink1description=Datasheet, componentlink1url=https://search.murata.co.jp/Ceramy/image/img/P02/JELF243A-0050.pdf, ComponentLink2Description="DigiKey Link", ComponentLink2URL=https://www.digikey.com/en/products/detail/murata-electronics/LQW15AN2N5B00D/2594886, Height - Seated (Max)="0.024\" (0.60mm)", lastupdated="1/9/2022 1:17:31 pm", Lifecycle Status=Active, Material - Core=Non-Magnetic, Minimum Order=1, Mounting Type="Surface Mount", Package / Case="0402 (1005 Metric)", packaging=TapeAndReel, Part Number=LQW15AN2N5B00D, Part Status=Active, partid=337, price=0.05, series=LQW15, Shielding=Unshielded, Size / Dimension="0.039\" L x 0.024\" W (1.00mm x 0.60mm)", Supplier 1=DigiKey, Type=Wirewound
L3: library part VLS201612CX-6R8M-1, "FIXED IND 6.8UH 930MA 368MOHM SM", Current - Saturation=730mA, Current Rating (Amps)="930 mA", DC Resistance (DCR)="368mOhm Max", Device Package=Nonstandard, Inductance="6.8 µH", Inductance Frequency - Test="1 MHz", Manufacturer="TDK Corporation", Operating Temperature="-40°C ~ 105°C", Supplier Device Package=2016, Supplier Part Number 1=445-172966-1-ND, Tolerance=±20%, componentlink1description=Datasheet, componentlink1url=https://product.tdk.com/info/en/catalog/datasheets/inductor_commercial_power_vls201612cx-1_en.pdf?ref_disty=digikey, ComponentLink2Description="DigiKey Link", ComponentLink2URL=https://www.digikey.com/en/products/detail/tdk-corporation/VLS201612CX-6R8M-1/5169771, Height - Seated (Max)="0.047\" (1.20mm)", lastupdated="11/9/2022 10:31:03 am", Lifecycle Status=Active, Material - Core=Ferrite, Minimum Order=1, Mounting Type="Surface Mount", Package / Case=Nonstandard, packaging=TapeAndReel, Part Number=VLS201612CX-6R8M-1, Part Status=Active, partid=207, price=0.13, series=VLS-CX-1, Shielding=Shielded, Size / Dimension="0.079\" L x 0.063\" W (2.00mm x 1.60mm)", Supplier 1=DigiKey, Type="Drum Core, Wirewound"
R1 R3 R5: library part ERA-2VRW1501X, "RES 1.5K OHM 0.05% 1/10W 0402", Device Package="0402 (1005 Metric)", Manufacturer="Panasonic Electronic Components", Operating Temperature="-55°C ~ 155°C", Power (Watts)="0.1W, 1/10W", Ratings=AEC-Q200, Resistance="1.5 kOhms", Supplier Device Package=0402, Supplier Part Number 1=10-ERA-2VRW1501XCT-ND, Temperature Coefficient=±10ppm/°C, Tolerance=±0.05%, componentlink1description=Datasheet, componentlink1url=https://api.pim.na.industrial.panasonic.com/file_stream/main/fileversion/9152, ComponentLink2Description="DigiKey Link", ComponentLink2URL=https://www.digikey.com/en/products/detail/panasonic-electronic-components/ERA-2VRW1501X/12086957, Composition="Thin Film", Features="Anti-Sulfur, Automotive AEC-Q200", Height - Seated (Max)="0.016\" (0.40mm)", lastupdated="11/9/2022 9:53:08 am", Lifecycle Status=Active, Minimum Order=1, Number of Terminations=2, Package / Case="0402 (1005 Metric)", packaging=TapeAndReel, Part Number=ERA-2VRW1501X, Part Status=Active, partid=67400, price=0.24, series=ERA-2V, Size / Dimension="0.039\" L x 0.020\" W (1.00mm x 0.50mm)", Supplier 1=DigiKey
R2 R4 R6: library part RP73PF1E10KBTD, "RES 10K OHM 0.1% 1/10W 0402", Device Package="0402 (1005 Metric)", Manufacturer="TE Connectivity Passive Product", Operating Temperature="-55°C ~ 155°C", Power (Watts)="0.1W, 1/10W", Resistance="10 kOhms", Supplier Device Package=0402, Supplier Part Number 1=A127415CT-ND, Temperature Coefficient=±25ppm/°C, Tolerance=±0.1%, componentlink1description=Datasheet, componentlink1url=https://www.te.com/commerce/DocumentDelivery/DDEController?Action=srchrtrv&DocNm=1773272&DocType=DS&DocLang=English, ComponentLink2Description="DigiKey Link", ComponentLink2URL=https://www.digikey.com/en/products/detail/te-connectivity-passive-product/RP73PF1E10KBTD/8260957, Composition="Thin Film", Height - Seated (Max)="0.014\" (0.35mm)", lastupdated="1/9/2022 12:46:57 pm", Lifecycle Status=Active, Minimum Order=1, Number of Terminations=2, Package / Case="0402 (1005 Metric)", packaging=TapeAndReel, Part Number=RP73PF1E10KBTD, Part Status=Active, partid=2434, price=0.09, series="RP73, Holsworthy", Size / Dimension="0.039\" L x 0.020\" W (1.00mm x 0.50mm)", Supplier 1=DigiKey
U1: library part EFR32MG24B220F1536IM48, "No Description Available", Mfr_Name="Silicon Labs", Copyright="Copyright (C) 2022 Ultra Librarian. All rights reserved.", Manufacturer_Part_Number=EFR32MG24B220F1536IM48, RefDes=RefDes, Type=DEV
U2: library part CMP-04942-000002-1, "SENSOR OPT 550NM AMBIENT 6USON", Manufacturer="Texas Instruments", Manufacturer Part Number=OPT3001DNPR, Max Junction Temp=+150°C, Max Supply Voltage=3.6V, Min Supply Voltage=1.6V, Operating Supply Current=0.3-1.8uA, Package=DNP0006A, Temperature="-40°C to +85°C", Temperature Range High=+85°C, Temperature Range Low=-40°C, Automotive=No, Category=IC, ComponentLink2Description=Datasheet, ComponentLink2URL=http://www.ti.com/lit/ds/symlink/opt3001.pdf, Device Class L1=Sensors, Device Class L2="Optical Sensors", Device Class L3=unset, Digikey Description="SENSOR OPT 550NM AMBIENT 6USON", Height=0.65mm, Ipc Land Pattern Name=DFN200X200X60-6, Lead Free=Yes, Octopart=https://octopart.com/opt3001dnpr-texas+instruments-47324050, RoHS=TRUE, Sensor Output=I2C,SMBus, Standoff Height=0mm
U3: library part A111, "A111 Radar Sensor", Package="SMD-50 acconeer", Availability=Unavailable, MF=acconeer, MP=A111, price=None, SnapEDA_Link=https://www.snapeda.com/parts/A111/acconeer/view-part/2777907/?ref=snap
U4: library part CMP-04918-000086-1, "ULTRA LOW IQ BUCK CONVERTER", Manufacturer="Texas Instruments", Manufacturer Part Number=TPS62840DLCR, Max Junction Temp=+125°C, Max Supply Voltage=6.5V, Min Supply Voltage=1.8V, Nominal Supply Current=0.005-3000uA, Output Current=750mA, Output Voltage=1.8-3.3V, Package=DLC0008B, Switching Frequency=1.8MHz, Temperature="-40°C to +125°C", Temperature Range Low=-40°C, Automotive=No, Category=IC, ComponentLink2Description=Datasheet, ComponentLink2URL=http://www.ti.com/lit/ds/symlink/tps62840.pdf, Device Class L1="Integrated Circuits (ICs)", Device Class L2="Power Management ICs", Device Class L3="Voltage Regulators - Switching", Digikey Description="ULTRA LOW IQ BUCK CONVERTER", Height=1mm, Ipc Land Pattern Name=DFN200X150X100-8, Lead Free=Yes, Max Duty Cycle=100%, Mouser Description="60-nA IQ, 1.8-V to 6.5-VIN, high-efficiency 750-mA step-down converter 8-VSON-HR -40 to 125", Number Of Outputs=1, Octopart=https://octopart.com/tps62840dlcr-texas+instruments-103121111, Output Type=AdjustableProgrammable, RoHS=TRUE, Standoff Height=0mm, Switching Topology=Buck, Temperature Range High=+125°C
Y1 Y2: library part CMP-20727-000003-1, "CRYSTAL 48.0000MHZ 7PF SMD", Frequency=48000kHz, Load Capacitance=7pF, Manufacturer=Kyocera, Manufacturer Part Number=CX2016DB48000C0WPLA2, Package=0, Temperature="-40°C to +85°C", Temperature Range High=+85°C, Temperature Range Low=-40°C, Tolerance=20ppm, Automotive=No, Category=Crys, ComponentLink2Description=Datasheet, ComponentLink2URL=https://global.kyocera.com/prdct/electro/product/pdf/cx2016db_e.pdf, Device Class L1="Passive Components", Device Class L2="Crystals / Oscillators", Device Class L3=Crystals, Digikey Description="CRYSTAL 48.0000MHZ 7PF SMD", Esr=22Ω, Height=0.45mm, Lead Free=Yes, Mouser Description="Crystals 48MHz 7pF", Octopart=https://octopart.com/cx2016db48000c0wpla2-avx+%2F+kyocera-52876167, RoHS=TRUE, series=CX2016DB
Y3: library part CMP-27762-003430-2, "Crystal 32.768kHz ±10ppm (Tol) 9pF FUND 90kΩ 2-Pin Mini-CSMD T/R", Case/Package=CSMD, ESR (Equivalent Series Resistance)=90kR, Frequency=32.768kHz, Frequency Tolerance=10ppm, Load Capacitance=9pF, Max Operating Temperature=85°C, Min Operating Temperature=-40°C, Package Quantity=3000, Depth=1.2mm, Height=0.6mm, Length=2mm, Mount="Surface Mount", Number of Pins=2, packaging="Tape and Reel", Radiation Hardening=No, REACH SVHC="No SVHC", RoHS Compliant=Yes, series=ABS06, Series Resistance=90kR, Termination=SMD/SMT, Tolerance=10ppm, Width=1.2mm

## Free pads (board coordinates)
  round 60 hole 30: 2(1588,1202) 3(1669,1202)

## Via types
v1: diameter 17.72, hole 7.87, Top Layer to Bottom Layer, tented both sides, 300 vias
v2: diameter 19.68, hole 7.87, Top Layer to Bottom Layer, 2 vias

## Nets (pads, with @x,y where several pads share a name; then routed paths per layer and width w, separated by ;. In a path a pad name is that pad's centre, name@x,y a point inside that pad or via, vN(x,y) a via of type N, cw(c..) or ccw(c..) an arc to the next point about the centre after c; other vN are vias at no path point)
1V8: C5.2 C6.2 C7.2 C8.2 C9.2 C10.2 C11.2 C12.2 C13.2 C14.2 C17.2 C18.2 C19.2 C20.2 C21.2 C22.1 C23.2 C25.2 J1.5 L3.2 pad.2 R2.2 R4.2 R6.1 U1.14 U1.17 U1.38 U1.40 U1.41 U1.42 U2.1 U3.C2 U3.C9 U3.D1 U3.D10 U3.J1 U3.J9 U3.K9 U4.8 | length 1345.8
  Top Layer w6: U3.D1@1665,1625 1666.36,1625 U3.C2 ; U3.C9 1840.9,1623.82 1880.32,1623.82
  Top Layer w8: v1(1581.66,1531.66) 1597.63,1531.66 C17.2 ; C17.2@1607.33,1524.67 U3.J1 ; U1.14 2376.51,1290.35 2399.26,1290.35 2428.13,1261.49 2432.19,1261.49 C10.2 ; U1.17 2413.46,1337.93 C11.2@2439.61,1364.07 ; C13.2@2489.21,1393.68 C13.2 2515.05,1393.68 2522.37,1401 v1(2525,1401)
  Top Layer w10: C22.1@1540,1639 1546.32,1632.68 C19.2 1598.5,1632.18 1598.5,1597.5 v1(1598,1597) ; C19.2@1600,1634 1600,1632.46 1609.37,1623.09 U3.D1 ; C23.2@1821,1389 1822.32,1390.32 C18.2 ; U3.J9 U3.K9 1822.13,1504.79 1822.13,1445.19 C18.2 ; v1(1850.71,1439.64) 1849.23,1441.12 1826.2,1441.12 C18.2 ; 1880.32,1623.82 C20.2@1899.5,1623.82 ; v1(1899,1596) 1899.5,1596.5 C20.2@1899.5,1623.82 ; C20.2 1899.5,1627.18 C20.2@1899.5,1623.82 ; C21.2@1955,1627.32 1951.49,1623.82 C20.2@1899.5,1623.82 ; U2.1 2305.67,1788.48 2305.67,1831.67 C14.2@2310,1836 ; C14.2 2312.82,1834.39 2343.61,1834.39 v1(2345,1833) ; C11.2 2446.81,1370.49 2466.02,1370.49 2489.21,1393.68 2490,1394.46 C13.2@2490,1398
  Top Layer w12: v1(1171,1870) 1171.5,1870.5 1237.5,1870.5 J1.5 ; v1(2058.63,1416.64) 2059.72,1417.74 2059.72,1424.18 2084.21,1448.68 C7.2 ; C7.2@2087,1452 2087,1447.46 2102.05,1432.42 U1.38 ; v1(2159,1667) R4.2 ; R2.2 2362.14,1667.5 2400.5,1667.5 v1(2401,1668) ; R6.1 2471.09,1153.36 2473.45,1151 v1(2475,1151) ; C10.2 2440.79,1253.68 2455.79,1238.68 C12.2 v1(2490,1206)
  other v1: 1399,1293 1376,1299 2048,1346 2048,1371
GND: ANT1.1 B1.2 C2.1 C3.1 C4.1 C5.1 C6.1 C7.1 C8.1 C9.1 C10.1 C11.1 C12.1 C13.1 C14.1 C15.1 C16.1 C17.1 C18.1 C19.1 C20.1 C21.1 C22.2 C23.1 C24.1 C25.1 C26.1 D1.2 D2.2 D3.2 J1.10 L4.2 pad.3 U1.15 U1.39 U1.49 U2.2 U2.3 U2.7 U3.A3 U3.A4 U3.A5 U3.A6 U3.A7 U3.A8 U3.A9 U3.B2 U3.B9 U3.B10 U3.C1 U3.C10 U3.D2 U3.D9 U3.E1 U3.E2 U3.E9 U3.E10 U3.F1 U3.F2 U3.F9 U3.G1 U3.G10 U3.H1 U3.H2 U3.H9 U3.J3 U3.J5 U3.J6 U3.J8 U3.K4 U3.K5 U3.K7 U4.1 U4.3 U4.5 U4.6 Y1.2 Y2.2 Y2.4 | length 109.1
  Top Layer w6: U1.49@2252,1297 2252,1297.64 2279.18,1324.82 2279.18,1343 2302,1320.18 v1(2302,1320) 2302.18,1320 U1.49@2315.75,1306.43
  other v1: 1050,1050 1125,1050 1200,1050 1275,1050 1350,1050 1425,1050 1575,1050 1800,1050 1950,1050 2025,1050 2100,1050 2175,1050 2250,1050 2325,1050 2400,1050 2475,1050 2550,1050 2625,1050 2700,1050 2775,1050 3000,1050 1087.5,1125 1162.5,1125 1237.5,1125 1312.5,1125 1387.5,1125 1462.5,1125 1612.5,1125 1987.5,1125 2062.5,1125 2137.5,1125 2212.5,1125 2287.5,1125 2512.5,1125 2587.5,1125 2662.5,1125 2737.5,1125 2812.5,1125 3037.5,1125 1050,1200 1500,1200 1800,1200 2550,1200 2625,1200 2700,1200 2775,1200 2850,1200 2925,1200 3000,1200 2375,1219 1462.5,1275 1537.5,1275 1612.5,1275 1687.5,1275 1762.5,1275 1912.5,1275 1987.5,1275 2737.5,1275 2887.5,1275 2962.5,1275 3037.5,1275 2181,1284 2220,1284 2261,1284 2303,1284 2341,1284 2755,1293 2619,1294 2653,1294 2689,1294 2723,1294 2786,1294 2532,1295 2559,1295 2588,1295 2467,1296 2816,1296 2875,1297 2905,1299 2938,1302 2180,1320 2219,1320 2260,1320 2340,1320 2956,1323 2978,1340 2644,1344 2806,1344 2874,1344 2518,1346 2713,1346 2834,1346 2908,1346 3051,1346 3070,1346 2546,1347 2579,1347 2677,1347 2608,1348 2775,1348 3025,1348 2742,1349 1050,1350 1125,1350 1200,1350 1275,1350 1350,1350 1575,1350 1650,1350 1800,1350 1875,1350 1950,1350 2489,1353 2181,1360 2220,1360 2261,1360 2303,1360 2341,1360 2997,1360 2930,1369 2540,1378 2182,1397.28 2221,1398 2262,1398 2304,1398 2342,1398 2983,1412 1087.5,1425 1162.5,1425 1237.5,1425 1312.5,1425 1537.5,1425 1612.5,1425 2587.5,1425 2662.5,1425 2737.5,1425 2812.5,1425 2181,1439 2220,1439 2261,1439 2303,1439 2341,1439 2995,1439 3069,1451 3017,1452 3047,1452 1050,1500 1125,1500 1200,1500 1275,1500 1350,1500 1425,1500 1500,1500 2475,1500 2550,1500 2700,1500 2775,1500 3000,1500 1087.5,1575 1162.5,1575 1237.5,1575 1312.5,1575 1387.5,1575 1462.5,1575 1612.5,1575 1762.5,1575 1912.5,1575 1987.5,1575 2062.5,1575 2137.5,1575 2362.5,1575 2437.5,1575 2512.5,1575 2737.5,1575 2812.5,1575 2887.5,1575 2962.5,1575 3037.5,1575 1050,1650 1125,1650 1200,1650 1275,1650 1725,1650 1800,1650 2025,1650 2475,1650 2550,1650 2700,1650 2775,1650 2850,1650 2925,1650 3000,1650 1162.5,1725 1462.5,1725 1537.5,1725 1612.5,1725 1687.5,1725 1762.5,1725 1837.5,1725 1912.5,1725 1987.5,1725 2212.5,1725 2362.5,1725 2437.5,1725 2512.5,1725 2587.5,1725 2662.5,1725 2737.5,1725 2812.5,1725 2887.5,1725 2962.5,1725 3037.5,1725 1050,1800 1125,1800 1500,1800 1575,1800 1650,1800 1725,1800 1800,1800 1875,1800 2100,1800 2175,1800 2325,1800 2400,1800 2475,1800 2550,1800 2625,1800 2700,1800 2775,1800 2850,1800 2925,1800 3000,1800 1087.5,1875 2062.5,1875 2137.5,1875 2212.5,1875 2287.5,1875 2362.5,1875 2437.5,1875 2512.5,1875 2587.5,1875 2662.5,1875 2737.5,1875 2812.5,1875 2887.5,1875 2962.5,1875 3037.5,1875
  other v2: 2264.25,1751 2295.75,1751
HFXI: U1.11 Y1.1 | length 132.2
  Top Layer w5: Y1.1@2325,1141 Y1.1@2325,1144.82 ; U1.11 2332.56,1244.94 2332.56,1225.2 2336.41,1221.34 2336.41,1221.07 2352.58,1204.9 2352.85,1204.9 2356.66,1201.09 2356.66,1161.59 2334.41,1139.35 Y1.1@2332.44,1139.35
HFXO: U1.12 Y1.3 | length 81.4
  Top Layer w5: U1.12 2347.24,1222.97 2356.31,1213.9 2356.58,1213.9 2365.66,1204.82 2365.66,1204.56 2372.34,1197.87 2372.34,1195.9 2385.59,1182.65 Y1.3@2387.56,1182.65
I2C_SCL: R4.1 U1.35 U2.4 | length 268.2
  Top Layer w5: U1.35 2189.79,1520.82 2184.09,1526.52 2184.09,1559.09 2245,1620 2245,1699.27 2254,1708.27 U2.4@2254,1714
I2C_SDA: R2.1 U1.34 U2.6 | length 291.8
  Top Layer w5: U1.34 2206.24,1477.83 2206.24,1513.95 2201.47,1518.73 2201.47,1521.87 2193.09,1530.25 2193.09,1552.09 2305.59,1664.59 U2.6 2305.59,1714.59 U2.6@2307,1716
NetANT1_2: ANT1.2 C27.1 L4.1 | length 123.3
  Top Layer w9.85: C27.1@2952.5,1351.86 C27.1 2997,1399 ANT1.2@3051,1399
NetC1_1: C1.1 C26.2 C27.2 | length 146.4
  Top Layer w9.85: C1.1 2780.18,1321.18 2850.18,1321.18 C26.2@2850.35,1321.35 ; C26.2 C26.2@2850.35,1321.35 ; C27.2@2922,1326 2917.35,1321.35 C26.2@2850.35,1321.35
NetC1_2: C1.2 L1.1 | length 46.1
  Top Layer w9.85: L1.1 2747,1321 C1.2@2748,1322
NetC2_2: C2.2 U1.36 | length 50.6
  Top Layer w10: C2.2@2162.54,1535 2162.32,1534.79 2162.32,1500.06 U1.36@2173.35,1489.03
NetC3_2: C3.2 L1.2 L2.1 | length 99.6
  Top Layer w9.85: L2.1@2569,1324 2572,1321 L2.1 C3.2@2620,1321 ; C3.2 L1.2@2667.32,1320.65
NetC4_2: C4.2 L2.2 U1.16 | length 162
  Top Layer w9.85: U1.16 2536.5,1322.18 L2.2
NetC15_2: C15.2 U3.J10 Y2.1 | length 148.6
  Top Layer w5: U3.J10 1876.35,1489.94 1890.06,1489.94 Y2.1@1902.5,1477.5 ; Y2.1@1905,1480 1912.68,1472.32 C15.2@1912.68,1423 ; C15.2@1908.35,1409 C15.2
NetC16_2: C16.2 U3.H10 Y2.3 | length 199.6
  Top Layer w5: U3.H10 1933.8,1544.35 1958.15,1520 Y2.3@1960,1520 ; Y2.3 2017,1520 C16.2@2019,1522 ; C16.2 C16.2@2020.68,1523 ; C16.2@2023,1525.32 C16.2@2020.68,1523 ; C16.2@2025,1523 C16.2@2020.68,1523
NetD1_1: D1.1 R1.1 | length 50.7
  Top Layer w5: D1.1@1455,1027.36 1503.36,1027.36 R1.1@1505,1029
NetD2_1: D2.1 R3.1 | length 63.6
  Top Layer w5: D2.1@1650,1027.36 R3.1@1705,1027.36 ; R3.1 1711.64,1034.36 R3.1@1713,1033
NetD3_1: D3.1 R5.1 | length 55.3
  Top Layer w5: D3.1@1835,1027.36 1882.36,1027.36 R5.1@1888,1033
NetL3_1: L3.1 U4.7
NetR1_2: R1.2 U1.8 | length 870.3
  Top Layer w4: v1(2276,1214) 2276,1217.01 2285,1226.01 U1.8@2285,1231
  Top Layer w5: v1(1509,1120) 1509,1080.64 R1.2
  Bottom Layer w5: v1@1509,1113 1544,1148 1906,1148 1945,1187 1978,1187 2249,1187 v1(2276,1214)
NetR3_2: R3.2 U1.9 | length 710.8
  Top Layer w4: v1(1704,1119) 1704,1080.64 R3.2
  Top Layer w5: v1(2296,1202) 2296,1218.64 2298.93,1221.57 2298.93,1243.93 U1.9@2300,1245
  Bottom Layer w5: v1(1704,1119) 1719,1134 1907,1134 1948,1175 2269,1175 v1(2296,1202)
NetR5_2: R5.2 U1.10 | length 551.5
  Top Layer w4: v1(1889,1116) 1889,1079.64 R5.2 ; v1(2315.75,1216.21) U1.10
  Bottom Layer w4: v1(1889,1116) 1891.01,1116 1900.51,1125.5 1912.5,1125.5 1952,1165 ; 1953.56,1165 2294,1165 2315.75,1186.75 v1(2315.75,1216.21)
NetU1_20: U1.20 U3.J2 | length 942.1
  Top Layer w5: v1(1661.13,1502.13) 1661.37,1502.13 1683.91,1524.67 U3.J2 ; U1.20 2377.41,1383.94 2405.77,1383.94 v1(2407,1382.72) v1@2407,1382
  Bottom Layer w5: v1(1661.13,1502.13) 1661,1502 1661,1479.27 1725.99,1414.28 1865.34,1414.28 1871.05,1420 2000.18,1420 2044.22,1464.03 2371.97,1464.03 2391,1445 2391,1398.72 v1(2407,1382.72)
NetU1_21: U1.21 U3.K6 | length 850.6
  Top Layer w5: U3.K6 1762.94,1504.93 1762.94,1481.06 v1(1763,1481) ; U1.21 2400.09,1400.92 2404.58,1405.41 v1(2408.02,1405.41)
  Bottom Layer w5: v1@1763,1479 1765,1479 1779,1465 1866.86,1465 1884.86,1447 1989,1447 2036,1494 2150.73,1494 2153.69,1491.03 2397.97,1491.03 2437.17,1451.83 2437.17,1417.41 2425.17,1405.41 v1(2408.02,1405.41)
NetU1_22: U1.22 U3.K3 | length 876.8
  Top Layer w5: U3.K3 1704.36,1504.45 1704.36,1482.56 v1(1704.9,1482.02) ; U1.22 2378.01,1418.5 2397.97,1418.5 2403.66,1424.18 v1(2420.81,1424.18)
  Bottom Layer w5: v1@1702,1487 1702,1484.92 v1(1704.9,1482.02) 1730.92,1456 1863.13,1456 1881.13,1438 1992.73,1438 2039.73,1485 2147,1485 2149.97,1482.03 2392.48,1482.03 2424.62,1449.9 2424.62,1436.34 2423.24,1434.97 2423.24,1430.06 v1@2418.18,1425
NetU1_23: U1.23 U3.K2 | length 843.8
  Top Layer w5: v1(1682.18,1482.18) 1683.16,1483.16 1683.16,1504 U3.K2 ; U1.23 2399.42,1432.42 2407.56,1440.56 v1(2407.56,1442.64)
  Bottom Layer w5: v1(1682.18,1482.18) 1682.18,1481.6 1725.79,1438 1829.22,1438 1843.93,1423.28 1861.61,1423.28 1867.32,1429 1996.46,1429 2040.49,1473.03 2377.17,1473.03 v1(2407.56,1442.64)
NetU1_30: U1.30 U3.F10 | length 506
  Top Layer w5: U3.F10 1841.76,1583.86 1865.86,1583.86 v1(1866,1584) ; v1(2264,1524) 2264.86,1523.14 2264.86,1504.01 2268.5,1500.36 U1.30
  Bottom Layer w5: v1(1866,1584) 1938,1512 2229.97,1512 2241.72,1523.75 2263.75,1523.75 v1(2264,1524)
NetU1_31: U1.31 U3.K8 | length 533.7
  Top Layer w5: v1(1802,1482) 1802.13,1482.13 1802.13,1504.86 U3.K8 ; v1(2248.5,1507.39) 2250.93,1504.97 2250.93,1478.93 U1.31
  Bottom Layer w5: v1(1802,1482) 1862.59,1482 1888.59,1456 1983,1456 2030,1503 2233.7,1503 2235.66,1504.96 2246.07,1504.96 v1(2248.5,1507.39)
NetU1_47: U1.47 Y3.1 | length 112.8
  Top Layer w5: Y3.1@2074,1207 2113,1246 2113,1273.31 2128.54,1288.85 2133.85,1288.85 U1.47@2136,1291
NetU1_48: U1.48 Y3.2 | length 125.9
  Top Layer w5: Y3.2 2122.23,1174.86 2122.23,1264.69 2133.54,1276 U1.48@2135,1276 ; U1.48@2140,1273.11 2141.83,1274.94 U1.48
nRST: J1.4 R6.2 U1.13 | length 1685.3